# EAGLE board LED_Platine_2_v2 (EAGLE 9.7.0)
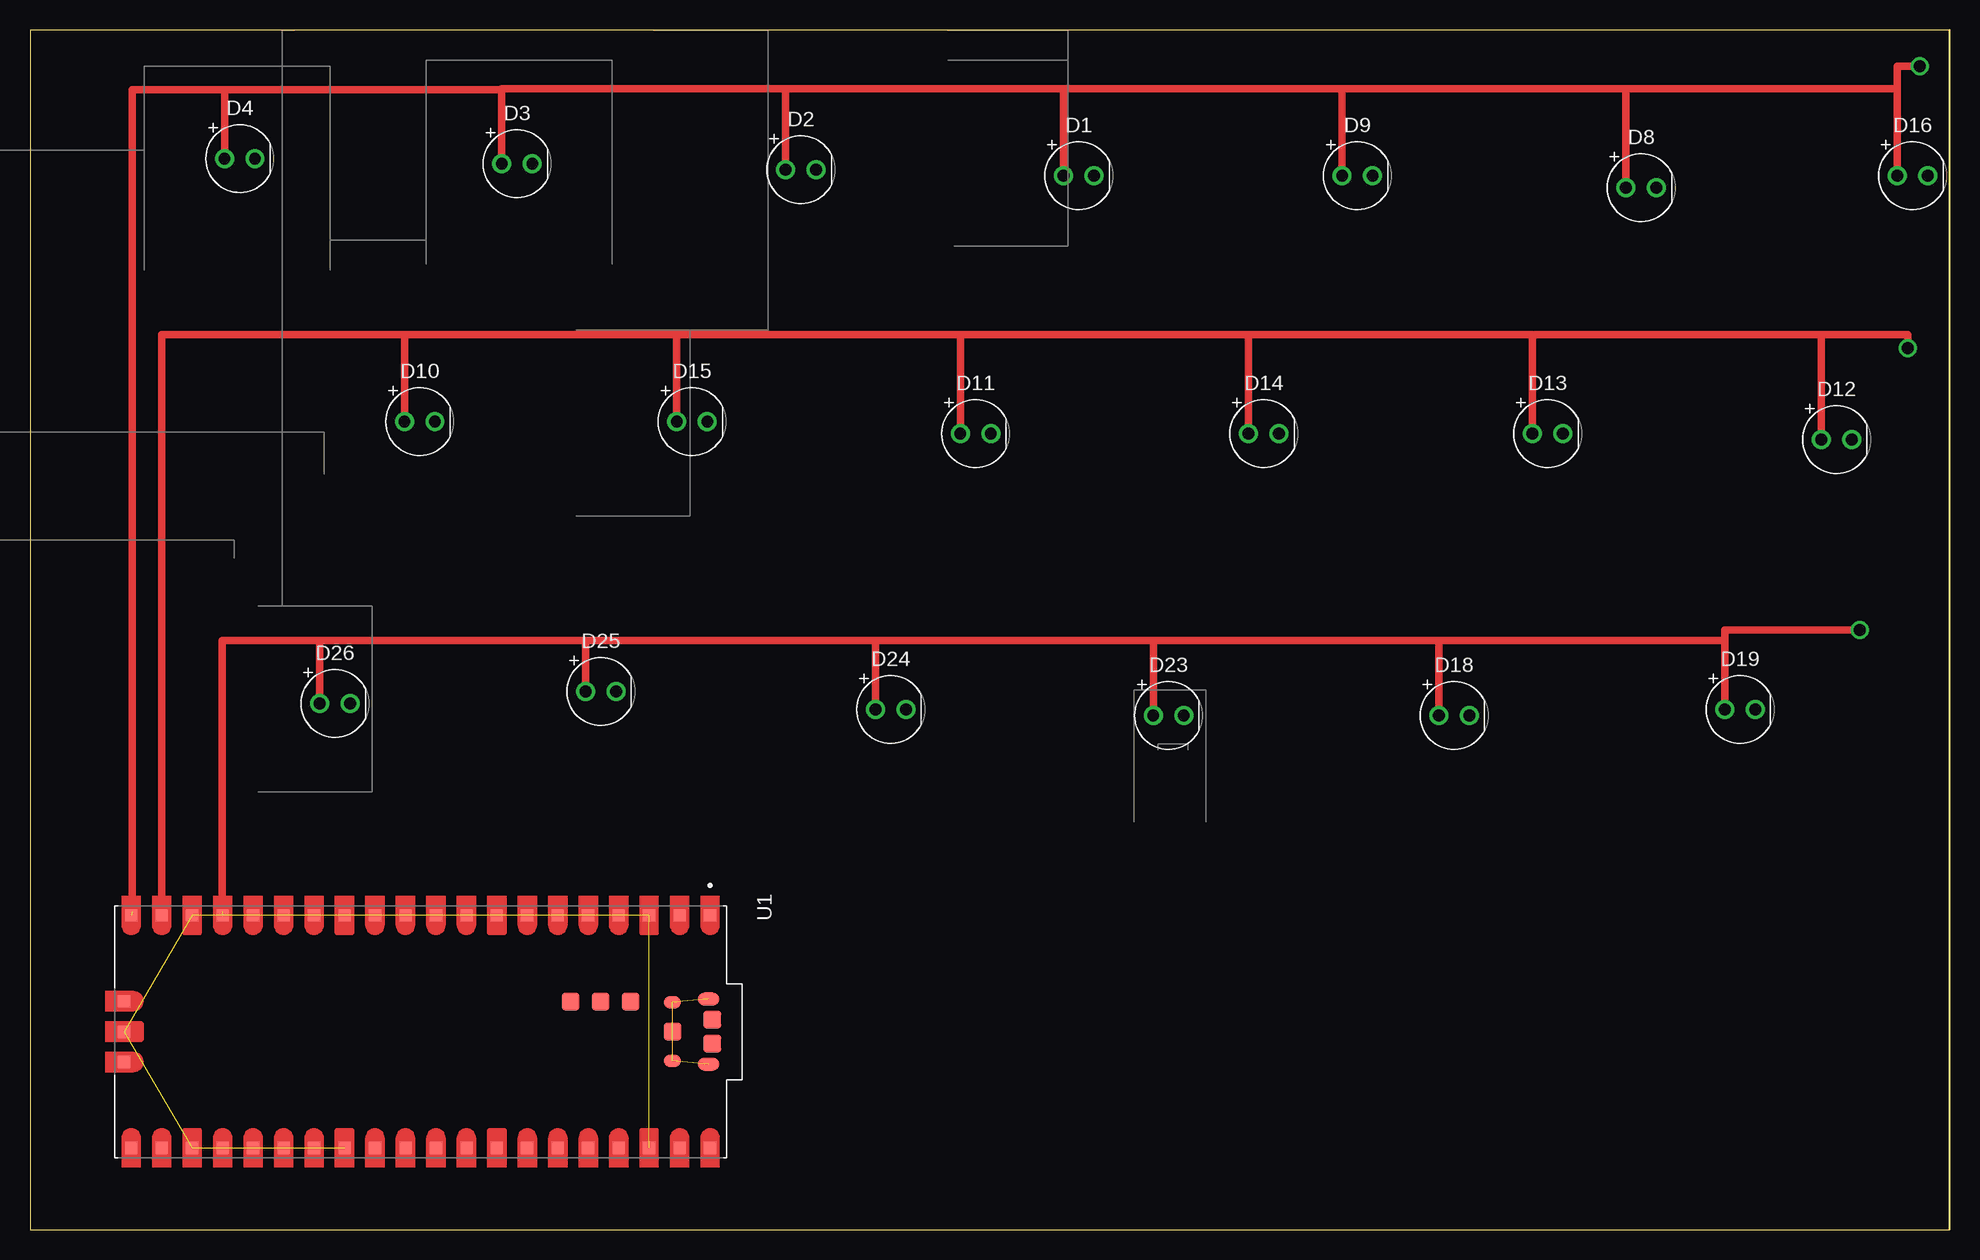
[diagram p0: board, top side]

Size 160 x 100 mm. Coordinates in mm from the lower left corner, seen from the top.
Outline: 0,0 160,0 160,100 0,100 0,0
Copper layers (1*16): Top 0.035mm / dielectric 1.5mm / Bottom 0.035mm
Design rules "Fusion Electronics Design Rules": minimum track width 6mil, minimum drill 0.35mm, track to track 6mil, track to pad 6mil, pad to pad 6mil, via to via 6mil, smd to smd 6mil, copper to edge 40mil, drill to drill 6mil, minimum pad ring 10mil, minimum via ring 8mil, stop-mask expansion 4mil, vias tented up to drill 9999mil, thermal gap 10mil

## Footprints (pad centres in the part's own frame; a part is rotated, then mirrored left to right if it is on the bottom)
LEDRD254W60D565H860B_W = drill 0.981 pad 1.581: 1 -1.27,0; 2 1.27,0
MODULE_SC0917 = smd 1 x 1: 1 -9.69,24.13; 2 -9.69,21.59; 3 -9.69,19.05; 4 -9.69,16.51; 5 -9.69,13.97; 6 -9.69,11.43; 7 -9.69,8.89; 8 -9.69,6.35; 9 -9.69,3.81; 10 -9.69,1.27; 11 -9.69,-1.27; 12 -9.69,-3.81; 13 -9.69,-6.35; 14 -9.69,-8.89; 15 -9.69,-11.43; 16 -9.69,-13.97; 17 -9.69,-16.51; 18 -9.69,-19.05; 19 -9.69,-21.59; 20 -9.69,-24.13; 21 9.69,-24.13; 22 9.69,-21.59; 23 9.69,-19.05; 24 9.69,-16.51; 25 9.69,-13.97; 26 9.69,-11.43; 27 9.69,-8.89; 28 9.69,-6.35; 29 9.69,-3.81; 30 9.69,-1.27; 31 9.69,1.27; 32 9.69,3.81; 33 9.69,6.35; 34 9.69,8.89; 35 9.69,11.43; 36 9.69,13.97; 37 9.69,16.51; 38 9.69,19.05; 39 9.69,21.59; 40 9.69,24.13; D1 -2.54,-24.7; D2 0,-24.7; D3 2.54,-24.7 | smd 1.1 x 1.8: A -2.725,24; B 2.725,24 | smd 1.05 x 1.45: C -2.425,20.97; D 2.425,20.97 | smd 1.5 x 1.5: TP1 0,21; TP2 1,24.3; TP3 -1,24.3; TP4 -2.5,17.5; TP5 -2.5,15; TP6 -2.5,12.5

## Placement (x,y rotation side)
D1  LED_WHITE  [LEDRD254W60D565H860B_W]  87.42,87.85 0 top
D2  LED_WHITE  [LEDRD254W60D565H860B_W]  64.26,88.35 0 top
D3  LED_WHITE  [LEDRD254W60D565H860B_W]  40.6,88.85 0 top
D4  LED_WHITE  [LEDRD254W60D565H860B_W]  17.48,89.28 0 top
D8  LED_WHITE  [LEDRD254W60D565H860B_W]  134.3,86.85 0 top
D9  LED_WHITE  [LEDRD254W60D565H860B_W]  110.64,87.85 0 top
D10  LED_WHITE  [LEDRD254W60D565H860B_W]  32.48,67.35 0 top
D11  LED_WHITE  [LEDRD254W60D565H860B_W]  78.82,66.35 0 top
D12  LED_WHITE  [LEDRD254W60D565H860B_W]  150.58,65.85 0 top
D13  LED_WHITE  [LEDRD254W60D565H860B_W]  126.5,66.35 0 top
D14  LED_WHITE  [LEDRD254W60D565H860B_W]  102.84,66.35 0 top
D15  LED_WHITE  [LEDRD254W60D565H860B_W]  55.18,67.35 0 top
D16  LED_WHITE  [LEDRD254W60D565H860B_W]  156.92,87.85 0 top
D18  LED_WHITE  [LEDRD254W60D565H860B_W]  118.7,42.85 0 top
D19  LED_WHITE  [LEDRD254W60D565H860B_W]  142.54,43.35 0 top
D23  LED_WHITE  [LEDRD254W60D565H860B_W]  94.9,42.85 0 top
D24  LED_WHITE  [LEDRD254W60D565H860B_W]  71.74,43.35 0 top
D25  LED_WHITE  [LEDRD254W60D565H860B_W]  47.58,44.85 0 top
D26  LED_WHITE  [LEDRD254W60D565H860B_W]  25.42,43.85 0 top
U1  SC0917  [MODULE_SC0917]  32.57,16.5 270 top

## Library data of the parts
D1-D4 D8-D16 D18 D19 D23-D26 = Tinkercad; CATEGORY: Opto-Electronic; SUB-CATEGORY: LED
U1 = SC0917; AVAILABILITY: In Stock; CHECK_PRICES: https://www.snapeda.com/parts/SC0917/Raspberry+Pi/view-part/?ref=eda; DESCRIPTION: RP2040 Raspberry Pi Pico - ARM® Cortex®-M0+ MCU 32-Bit Embedded Evaluation Board; MF: Raspberry Pi; MP: SC0917; PACKAGE: None; PRICE: None; SNAPEDA_LINK: https://www.snapeda.com/parts/SC0917/Raspberry+Pi/view-part/?ref=snap

## Nets
3V3_OUT: U1.36
ADC_VREF: U1.35
AGND: U1.33
GND: U1.3 U1.8 U1.13 U1.18 U1.23 U1.28 U1.38 U1.D2
N$1: D10.1 D11.1 D12.1 D13.1 D14.1 D15.1 U1.19
N$2: D18.1 D19.1 D23.1 D24.1 D25.1 D26.1 U1.17
N$11: D1.1 D2.1 D3.1 D4.1 D8.1 D9.1 D16.1 U1.20
TP1_GND: U1.TP1
USB_SHIELD: U1.A U1.B U1.C U1.D
VBUS: U1.40
VSYS: U1.39

## Tracks (layer width: path | path; a pad name or v marks a point on that pad's centre or on a via)
GND  (7 unrouted)
N$1
  Top 0.61: 149.31,74.6 125.48,74.6 125.23,74.35 D13.1 125.23,74.6 101.57,74.6 | D12.1 149.31,74.6 | 101.57,74.6 77.55,74.6 D11.1 77.55,74.6 53.91,74.6 D15.1 53.91,74.6 31.21,74.6 | 101.57,74.6 D14.1 | D10.1 31.21,74.6 | 31.21,74.6 10.98,74.6 U1.19 | 149.31,74.6 156.5,74.6 156.5,73.5
N$2  (1 unrouted)
  Top 0.61: 24.15,49.1 46.31,49.1 D25.1 46.31,49.1 70.47,49.1 | 24.15,49.1 D26.1 | D24.1 70.47,49.1 | 70.47,49.1 93.63,49.1 D23.1 93.63,49.1 117.43,49.1 | 117.43,49.1 D18.1 | 117.43,49.1 141.27,49.1 | D19.1 141.27,49.1 | 24.15,49.1 16,49.1 16,26.5 | 141.27,49.1 141.27,50 152.5,50
N$3  (via drill 1)
  other vias: 157.5,97
N$6  (via drill 1)
  other vias: 156.5,73.5
N$7  (via drill 1)
  other vias: 152.5,50
N$11  (1 unrouted)
  Top 0.61: 16.21,95.03 39.33,95.03 D3.1 39.33,95.1 62.99,95.1 | D4.1 16.21,95.03 | D2.1 62.99,95.1 | 62.99,95.1 86.15,95.1 D1.1 86.15,95.1 109.37,95.1 D9.1 109.37,95.1 133.03,95.1 D8.1 133.03,95.1 155.65,95.1 | D16.1 155.65,95.1 | 16.21,95.03 8.5,95.03 8.5,26.5 | 155.65,95.1 155.65,97 157.5,97
USB_SHIELD  (3 unrouted)